# Altium PCB FlameClock_1.1.PcbDoc (part 1 of 2)
Units mm, origin at the board's own origin, x right, y up, seen from the top; angles counter-clockwise.
Board outline 139.1 x 139.1 mm, 2 copper layers (Top, Bottom); 164 components, 272 nets, 674 pads, 352 vias.
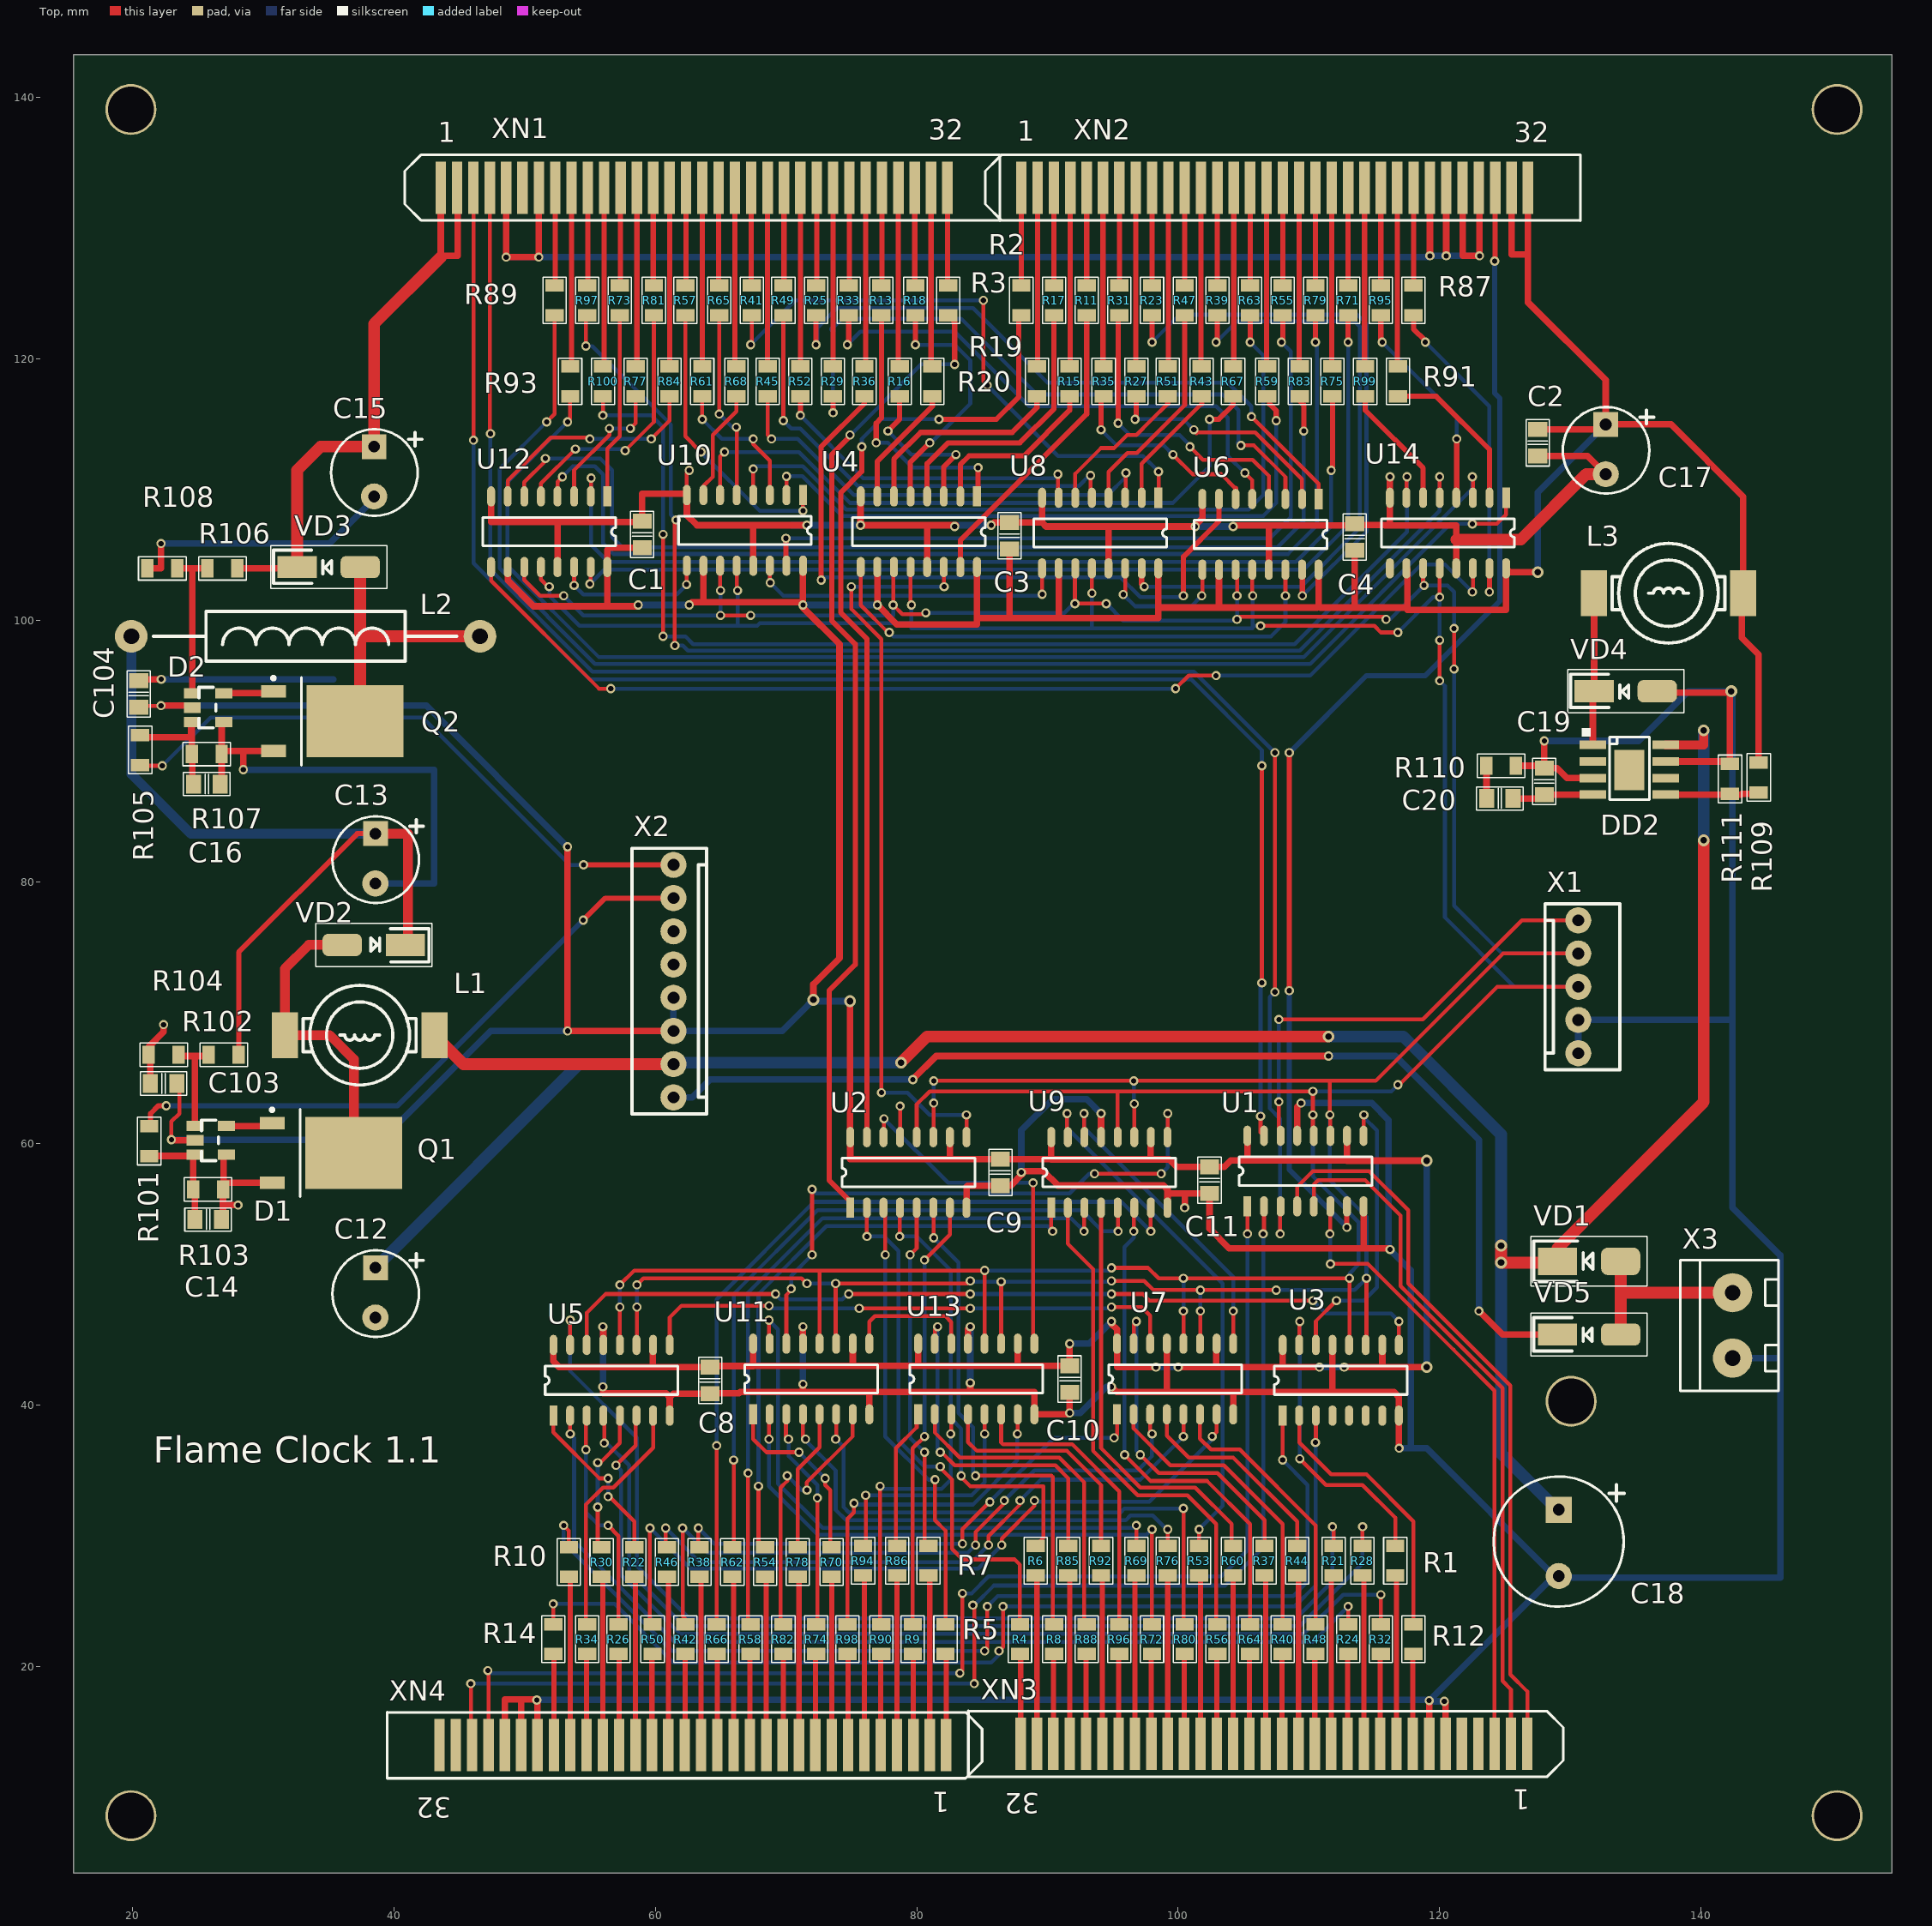
[diagram p0: Top view]
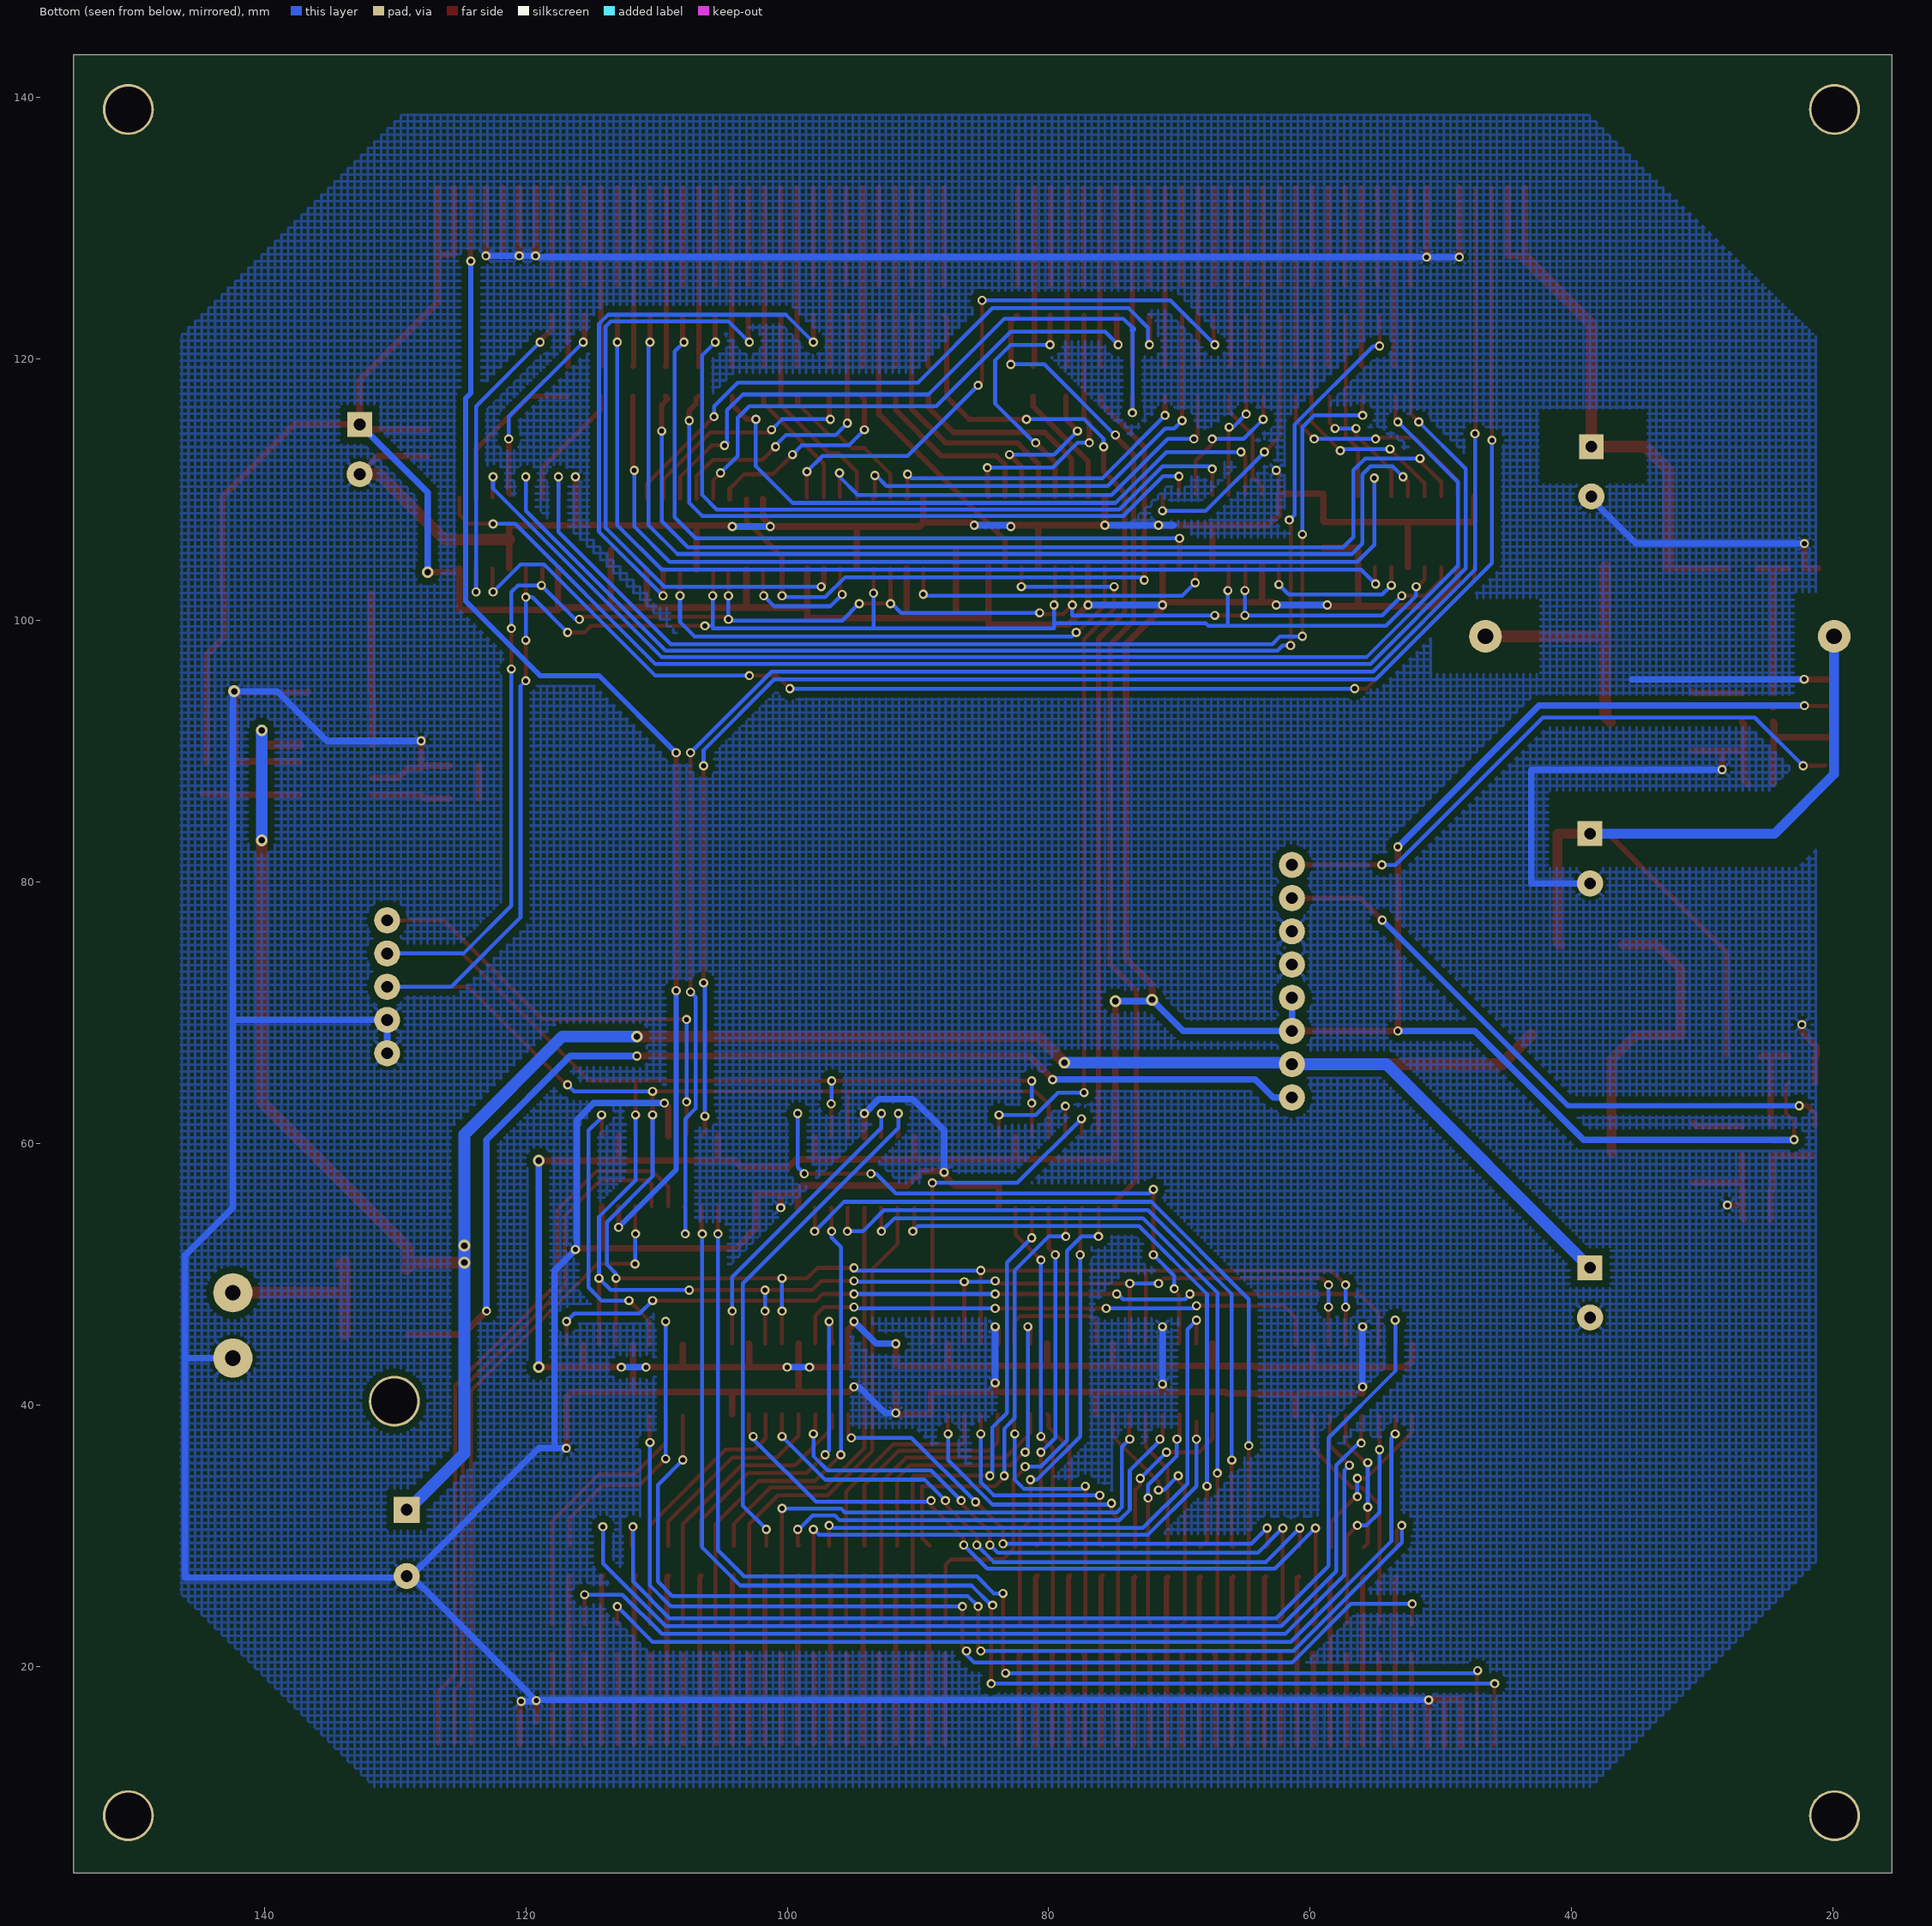
[diagram p1: Bottom view, seen from below]

## Layer stack, top to bottom
Top Solder: solder mask 0.0102, Solder Resist, Dk 3.5
Top: signal copper 0.0356
Dielectric 1: dielectric 0.32, FR-4, Dk 4.8
Bottom: signal copper 0.0356
Bottom Solder: solder mask 0.0102, Solder Resist, Dk 3.5

## Board outline
15.5,4.2 154.6,4.2 154.6,143.3 15.5,143.3

## Design rules (kind name [scope] priority, off if disabled: settings)
Clearance [All] p1: gap=0.2 ignorepadtopadclearanceinfootprint=TRUE except(0.5: Arc-Fill Arc-Poly Arc-Region Track-Fill Track-Poly Track-Region SMDPad-Fill SMDPad-Poly SMDPad-Region THPad-Fill THPad-Poly THPad-Region Via-Fill Via-Poly Via-Region Fill-Fill Fill-Poly Fill-Region Poly-Poly Poly-Region Region-Region)
Clearance Clearance_poligon [InPolygon] p2: gap=0.5 ignorepadtopadclearanceinfootprint=TRUE
PolygonConnect [All] p1: connectstyle=Relief reliefconductorwidth=0.254 reliefentries=4 polygonreliefangle="45 Angle" airgapwidth=0.254
RoutingVias [All] p1: holewidth=0.4 width=0.7 viastyle="Through Hole" minholewidth=0.4 minwidth=0.7 maxholewidth=0.9 maxwidth=1.5
SolderMaskExpansion [All] p1: expansion=0.102
Width [All] p1: maxlimit=0.9 minlimit=0.3 preferedwidth=0.5 minimp=50.000000 maximp=50.000000 favimp=50.000000
30 further rules are at their usual default settings.

## Components (designator, comment, footprint, x,y, rotation, side; value= is the part's Value field where it differs from the comment)
C1 "C0805_S" CC0805_S 59,106.6 r90 top value=220n
C2 "C0805_S" CC0805_S 127.5,113.6 r270 top value=220n
C3 "C0805_S" CC0805_S 87.1,106.5 r90 top value=220n
C4 "C0805_S" CC0805_S 113.5,106.4 r90 top value=220n
C8 "C0805_S" CC0805_S 64.2,41.9 r270 top value=220n
C9 "C0805_S" CC0805_S 86.4,57.8 r270 top value=220n
C10 "C0805_S" CC0805_S 91.7,42 r270 top value=220n
C11 "C0805_S" CC0805_S 102.4,57.2 r270 top value=220n
C12 "47uf 25v" CE3.8 38.6,46.7 r90 top
C13 "47uf 100v" CE3.8 38.6,79.9 r90 top
C14 "C0805_S" CC0805_S 25.8,54.2 r0 top value=220n
C15 "2.2uf 400v" CE3.8 38.5,109.5 r90 top
C16 "C0805_S" CC0805_S 25.7,87.5 r0 top value=220n
C17 "100uf 25v" CE3.8 132.7,111.2 r90 top
C18 "470uf 25v" CE10 129.1,26.924 r90 top
C19 "C0805_S" CC0805_S 128,87.7 r90 top value=220p
C20 "C0805_S" CC0805_S 124.6,86.4 r180 top value=22n
C103 "C0805_S" CC0805_S 22.4,64.6 r180 top value=220n
C104 "C0805_S" CC0805_S 20.5,94.4 r90 top value=220n
D1 "TC110" SOT-23A 26,60.2 r90 top
D2 "TC110" SOT-23A 25.8,93.3 r90 top
DD2 "L5973" "SO8 - termal" 131.712,90.5 r0 top
L1 "SMD_L" SMD_L 37.4,68.3 r180 top value=100mH
L2 "DROS" DROS 19.93,98.8 r0 top value=100mH
L3 "SMD_L" SMD_L 137.5,102.1 r0 top value=100mH
Q1 "IRFR220" TO-252AA_N 35.2,59.28 r0 top
Q2 "IRFR220" TO-252AA_N 35.3,92.3 r0 top
R1 "R0805_S" R0805_S 116.6,28.1 r90 top value=4k7
R2 "R0805_S" R0805_S 88,124.5 r270 top value=4k7
R3 "R0805_S" R0805_S 82.4,124.5 r270 top value=4k7
R4 "R0805_S" R0805_S 87.9,22.1 r90 top value=4k7
R5 "R0805_S" R0805_S 82.2,22.1 r90 top value=4k7
R6 "R0805_S" R0805_S 89.1,28.1 r90 top value=4k7
R7 "R0805_S" R0805_S 80.9,28.1 r90 top value=4k7
R8 "R0805_S" R0805_S 90.5,22.1 r90 top value=4k7
R9 "R0805_S" R0805_S 79.7,22.1 r90 top value=4k7
R10 "R0805_S" R0805_S 53.4,28 r90 top value=4k7
R11 "R0805_S" R0805_S 93,124.5 r270 top value=4k7
R12 "R0805_S" R0805_S 118,22.1 r90 top value=4k7
R13 "R0805_S" R0805_S 77.3,124.5 r270 top value=4k7
R14 "R0805_S" R0805_S 52.2,22.1 r90 top value=4k7
R15 "R0805_S" R0805_S 91.7,118.3 r270 top value=4k7
R16 "R0805_S" R0805_S 78.7,118.3 r270 top value=4k7
R17 "R0805_S" R0805_S 90.5,124.5 r270 top value=4k7
R18 "R0805_S" R0805_S 79.9,124.5 r270 top value=4k7
R19 "R0805_S" R0805_S 89.2,118.3 r270 top value=4k7
R20 "R0805_S" R0805_S 81.2,118.3 r270 top value=4k7
R21 "R0805_S" R0805_S 111.9,28.1 r90 top value=4k7
R22 "R0805_S" R0805_S 58.4,28 r90 top value=4k7
R23 "R0805_S" R0805_S 98,124.5 r270 top value=4k7
R24 "R0805_S" R0805_S 113,22.1 r90 top value=4k7
R25 "R0805_S" R0805_S 72.3,124.5 r270 top value=4k7
R26 "R0805_S" R0805_S 57.2,22.1 r90 top value=4k7
R27 "R0805_S" R0805_S 96.8,118.3 r270 top value=4k7
R28 "R0805_S" R0805_S 114.1,28.1 r90 top value=4k7
R29 "R0805_S" R0805_S 73.6,118.3 r270 top value=4k7
R30 "R0805_S" R0805_S 55.9,28 r90 top value=4k7
R31 "R0805_S" R0805_S 95.5,124.5 r270 top value=4k7
R32 "R0805_S" R0805_S 115.5,22.1 r90 top value=4k7
R33 "R0805_S" R0805_S 74.8,124.5 r270 top value=4k7
R34 "R0805_S" R0805_S 54.8,22.1 r90 top value=4k7
R35 "R0805_S" R0805_S 94.3,118.3 r270 top value=4k7
R36 "R0805_S" R0805_S 76,118.3 r270 top value=4k7
R37 "R0805_S" R0805_S 106.6,28.1 r90 top value=4k7
R38 "R0805_S" R0805_S 63.4,28 r90 top value=4k7
R39 "R0805_S" R0805_S 103,124.5 r270 top value=4k7
R40 "R0805_S" R0805_S 108,22.1 r90 top value=4k7
R41 "R0805_S" R0805_S 67.4,124.5 r270 top value=4k7
R42 "R0805_S" R0805_S 62.3,22.1 r90 top value=4k7
R43 "R0805_S" R0805_S 101.8,118.3 r270 top value=4k7
R44 "R0805_S" R0805_S 109.1,28.1 r90 top value=4k7
R45 "R0805_S" R0805_S 68.6,118.3 r270 top value=4k7
R46 "R0805_S" R0805_S 60.9,28 r90 top value=4k7
R47 "R0805_S" R0805_S 100.5,124.5 r270 top value=4k7
R48 "R0805_S" R0805_S 110.5,22.1 r90 top value=4k7
R49 "R0805_S" R0805_S 69.8,124.5 r270 top value=4k7
R50 "R0805_S" R0805_S 59.8,22.1 r90 top value=4k7
R51 "R0805_S" R0805_S 99.2,118.3 r270 top value=4k7
R52 "R0805_S" R0805_S 71.1,118.3 r270 top value=4k7
R53 "R0805_S" R0805_S 101.6,28.1 r90 top value=4k7
R54 "R0805_S" R0805_S 68.4,28 r90 top value=4k7
R55 "R0805_S" R0805_S 108,124.5 r270 top value=4k7
R56 "R0805_S" R0805_S 103,22.1 r90 top value=4k7
R57 "R0805_S" R0805_S 62.3,124.5 r270 top value=4k7
R58 "R0805_S" R0805_S 67.3,22.1 r90 top value=4k7
R59 "R0805_S" R0805_S 106.8,118.3 r270 top value=4k7
R60 "R0805_S" R0805_S 104.2,28.1 r90 top value=4k7
R61 "R0805_S" R0805_S 63.6,118.3 r270 top value=4k7
R62 "R0805_S" R0805_S 65.9,28 r90 top value=4k7
R63 "R0805_S" R0805_S 105.5,124.5 r270 top value=4k7
R64 "R0805_S" R0805_S 105.5,22.1 r90 top value=4k7
R65 "R0805_S" R0805_S 64.9,124.5 r270 top value=4k7
R66 "R0805_S" R0805_S 64.7,22.1 r90 top value=4k7
R67 "R0805_S" R0805_S 104.2,118.3 r270 top value=4k7
R68 "R0805_S" R0805_S 66.2,118.3 r270 top value=4k7
R69 "R0805_S" R0805_S 96.8,28.1 r90 top value=4k7
R70 "R0805_S" R0805_S 73.5,28 r90 top value=4k7
R71 "R0805_S" R0805_S 113,124.5 r270 top value=4k7
R72 "R0805_S" R0805_S 98,22.1 r90 top value=4k7
R73 "R0805_S" R0805_S 57.3,124.5 r270 top value=4k7
R74 "R0805_S" R0805_S 72.3,22.1 r90 top value=4k7
R75 "R0805_S" R0805_S 111.8,118.3 r270 top value=4k7
R76 "R0805_S" R0805_S 99.2,28.1 r90 top value=4k7
R77 "R0805_S" R0805_S 58.5,118.3 r270 top value=4k7
R78 "R0805_S" R0805_S 70.9,28 r90 top value=4k7
R79 "R0805_S" R0805_S 110.5,124.5 r270 top value=4k7
R80 "R0805_S" R0805_S 100.5,22.1 r90 top value=4k7
R81 "R0805_S" R0805_S 59.9,124.5 r270 top value=4k7
R82 "R0805_S" R0805_S 69.8,22.1 r90 top value=4k7
R83 "R0805_S" R0805_S 109.3,118.3 r270 top value=4k7
R84 "R0805_S" R0805_S 61.1,118.3 r270 top value=4k7
R85 "R0805_S" R0805_S 91.6,28.1 r90 top value=4k7
R86 "R0805_S" R0805_S 78.5,28.1 r90 top value=4k7
R87 "R0805_S" R0805_S 118,124.5 r270 top value=4k7
R88 "R0805_S" R0805_S 93,22.1 r90 top value=4k7
R89 "R0805_S" R0805_S 52.3,124.5 r270 top value=4k7
R90 "R0805_S" R0805_S 77.3,22.1 r90 top value=4k7
R91 "R0805_S" R0805_S 116.8,118.3 r270 top value=4k7
R92 "R0805_S" R0805_S 94.1,28.1 r90 top value=4k7
R93 "R0805_S" R0805_S 53.5,118.3 r270 top value=4k7
R94 "R0805_S" R0805_S 75.9,28.1 r90 top value=4k7
R95 "R0805_S" R0805_S 115.5,124.5 r270 top value=4k7
R96 "R0805_S" R0805_S 95.5,22.1 r90 top value=4k7
R97 "R0805_S" R0805_S 54.8,124.5 r270 top value=4k7
R98 "R0805_S" R0805_S 74.7,22.1 r90 top value=4k7
R99 "R0805_S" R0805_S 114.3,118.3 r270 top value=4k7
R100 "R0805_S" R0805_S 56,118.3 r270 top value=4k7
R101 "33k" R0805_S 21.3,60.2 r90 top
R102 "100k" R0805_S 27,66.8 r180 top
R103 "470k" R0805_S 25.8,56.5 r0 top
R104 "10k" R0805_S 22.4,66.8 r180 top
R105 "33k" R0805_S 20.6,90.1 r270 top
R106 "470k" R0805_S 26.9,104 r180 top
R107 "470k" R0805_S 25.7,89.8 r0 top
R108 "47k" R0805_S 22.3,104 r180 top
R109 "15k" R0805_S 144.4,88 r270 top
R110 "4k7" R0805_S 124.7,88.9 r0 top
R111 "5k6" R0805_S 142.2,87.9 r90 top
U1 "SN74HC595" SOIC16 105.29,55.2 r90 top
U2 "SN74HC595" SOIC16 74.92,55.1 r90 top
U3 "SN74HC595" SOIC16 107.99,39.2 r90 top
U4 "SN74HC595" SOIC16 84.61,109.5 r270 top
U5 "SN74HC595" SOIC16 52.22,39.2 r90 top
U6 "SN74HC595" SOIC16 110.74,109.3 r270 top
U7 "SN74HC595" SOIC16 95.32,39.3 r90 top
U8 "SN74HC595" SOIC16 98.48,109.4 r270 top
U9 "SN74HC595" SOIC16 90.29,55.1 r90 top
U10 "SN74HC595" SOIC16 71.31,109.6 r270 top
U11 "SN74HC595" SOIC16 67.49,39.3 r90 top
U12 "SN74HC595" SOIC16 56.34,109.5 r270 top
U13 "SN74HC595" SOIC16 80.11,39.3 r90 top
U14 "SN74HC595" SOIC16 125.08,109.4 r270 top
VD1 "*" DIOD_SS2 131.3,51 r90 top
VD2 "DIODE_SS1" DIOD_SS1 38.6,75.2 r270 top value=US2M
VD3 "DIODE_SS1" DIOD_SS1 34.9,104.1 r90 top value=US2M
VD4 "DIODE_SS1" DIOD_SS1 134.1,94.6 r90 top value=SS16
VD5 "DIODE_SS1" DIOD_SS1 131.3,45.4 r90 top
X1 "KONN_5_2,5" KONN_5_2.5MM 130.6,77.08 r270 top
X2 "KONN_8_2.5MM" KONN_8_2.5MM 61.4,63.54 r90 top
X3 "CONN_5MM_2" CONN5_2 142.4,48.6 r0 top
XN1 "KON_SMD_32_1.25MM" KON_SMD_32_1.25MM 43.6,133.1 r90 top
XN2 "KON_SMD_32_1.25MM" KON_SMD_32_1.25MM 88,133.1 r90 top
XN3 "KON_SMD_32_1.25MM" KON_SMD_32_1.25MM 126.7,14.1 r270 top
XN4 "KON_SMD_32_1.25MM" KON_SMD_32_1.25MM 82.25,14 r270 top

## Footprints (in the part's own frame and the unit in brackets; to place one, negate y for a bottom-side part, rotate by r counter-clockwise, add the part's x,y. Pads: shape width x height; smd on the part's side, far side on the other; paste and mask are expansions set on the pad)
CC0805_S [mm]
  rect 1.15x1.45 smd: 1(-1.016,0) 2(1.016,0)
  silkscreen extent -1.78,-0.89 1.78,0.89
CE3.8 [mm]
  rect 1.9x1.9 hole 0.9: 1(3.81,0)
  round 2 hole 0.9: 2(0,0)
  silkscreen extent -1.48,-3.67 5.13,3.28
CE10 [mm]
  rect 2x2 hole 0.9: 1(5.08,0)
  round 2 hole 0.9: 2(0,0)
  silkscreen extent -2.33,-5.02 7.62,4.97
CONN5_2 [mm]
  round 3 hole 1.2: 1(0,0) 2(0,-5)
  silkscreen extent -4,-7.5 3.5,2.5
DIOD_SS1 [mm]
  rect 1.7x3 smd: 1(0,2.286)
  rrect50% 1.7x3 smd: 2(0,-2.54)
  silkscreen extent -1.65,-4.57 1.65,4.32
DIOD_SS2 [mm]
  rect 2.1x3 smd: 1(0,2.286)
  rrect50% 2.1x3 smd: 2(0,-2.54)
  silkscreen extent -1.91,-4.57 1.9,4.32
DROS [mm]
  round 2.5 hole 1.2: 1(0,0) 2(26.67,0)
  silkscreen extent 1.7,-1.91 24.9,1.91
KON_SMD_32_1.25MM [mm]
  rect 4x0.8 smd: 1(0,0) 2(0,-1.25) 3(0,-2.5) 4(0,-3.75) 5(0,-5) 6(0,-6.25) 7(0,-7.5) 8(0,-8.75) 9(0,-10) 10(0,-11.25) 11(0,-12.5) 12(0,-13.75) 13(0,-15) 14(0,-16.25) 15(0,-17.5) 16(0,-18.75) 17(0,-20) 18(0,-21.25) 19(0,-22.5) 20(0,-23.75) 21(0,-25) 22(0,-26.25) 23(0,-27.5) 24(0,-28.75) 25(0,-30) 26(0,-31.25) 27(0,-32.5) 28(0,-33.75) 29(0,-35) 30(0,-36.25) 31(0,-37.5) 32(0,-38.75)
  silkscreen extent -2.53,-42.75 2.54,2.75
KONN_5_2.5MM [mm]
  round 2 hole 0.9: 1(0,0) 2(2.54,0) 3(5.08,0) 4(7.62,0) 5(10.16,0)
  silkscreen extent -1.27,-2.54 11.43,3.18
KONN_8_2.5MM [mm]
  round 2 hole 0.9: 1(0,0) 2(2.54,0) 3(5.08,0) 4(7.62,0) 5(10.16,0) 6(12.7,0) 7(15.24,0) 8(17.78,0)
  silkscreen extent -1.27,-2.54 19.05,3.18
R0805_S [mm]
  rect 0.95x1.4 smd: 1(-1.143,0) 2(1.143,0)
  silkscreen extent -1.78,-0.89 1.78,0.89
SMD_L [mm]
  rect 2x3.5 smd: 0(-5.715,0) 1(5.715,0)
  silkscreen extent -4.32,-3.81 4.32,3.81
"SO8 - termal" [mil]
  rect 80x26 smd: 1(0,0) 2(0,-50) 3(0,-100) 4(0,-150) 5(220,-150) 6(220,-100) 7(220,-50) 8(220,0)
  rect 90.55x122.05 smd: 9(110,-76)
  silkscreen extent -32,-165 170,50
SOIC16 [mm]
  rect 1.55x0.6 smd: 1(0,0)
  oval 1.55x0.6 smd: 2(0,-1.27) 3(0,-2.54) 4(0,-3.81) 5(0,-5.08) 6(0,-6.35) 7(0,-7.62) 8(0,-8.89) 9(5.4,-8.89) 10(5.4,-7.62) 11(5.4,-6.35) 12(5.4,-5.08) 13(5.4,-3.81) 14(5.4,-2.54) 15(5.4,-1.27) 16(5.4,0)
  silkscreen extent 1.61,-9.53 3.79,0.64, body extent -0.44,-9.53 5.84,0.64, height 1.75
SOT-23A [mm]
  rect 0.8x1.3 smd: 1(1.15,1.2) 2(0.05,1.2) 3(-1.05,1.2) 4(-1.05,-1.2) 5(1.15,-1.2)
  silkscreen extent -1.5,-0.6 1.6,0.7
TO-252AA_N [mm] "D-PAK, 4-Leads, Body 6.1x6.5mm, Pitch 2.28mm, Lead Span 9.9mm, IPC Medium Density"
  rect 1.9x0.95 smd: 1(-4.5,2.28) 3(-4.5,-2.28)
  rect 7.4x5.5 smd: 4(1.75,0)
  silkscreen extent -4.62,-3.35 -2.35,3.43, body extent -2.25,-3.37 4.1,3.37, height 2.38

## Part data
C12 C13 C15 C17: library part CE3.8_6.5MM
C18: library part CE5.0_10MM
Q1 Q2: "HEXFET Power MOSFET", Code_JEDEC=TO-252-AA, ComponentLink1Description="Manufacturer Link", ComponentLink1URL=http://www.irf.com/, ComponentLink2Description=Datasheet, ComponentLink2URL=http://www.irf.com/product-info/datasheets/data/irfr220.pdf, DatasheetVersion=PD-9.525D, LatestRevisionDate=20-Nov-2009, LatestRevisionNote="IPC-7351 Footprint Added.", Note="Pin 2 is trimmed and is electrically connected to Drain.", PackageDescription="3-Pin HEXFET Package 2.28 mm Pitch, 9.9 mm Lead Span", PackageReference=TO-252AA, PackageVersion=Feb-2003, Published=8-Jun-2000, Publisher="Altium Limited"
R101 R102 R103 R104 R105 R106 R107 R108 R109 R110 R111: library part R0805_S
U1 U2 U3 U4 U5 U6 U7 U8 U9 U10 U11 U12 U13 U14: "8-Bit Shift Registers with 3-State Output Registers"
VD1: library part DIODE_SS2

## Free pads (board coordinates)
  round 2 on Drill Drawing: 3(104,86.5)
  round 3.9 hole 3.5: 4(19.9,8.6) 5(19.9,139.1) 6(150.4,139.1) 7(130.048,40.3) 7(150.4,8.6)

## Via types
v1: diameter 0.7, hole 0.4, Top to Bottom, 340 vias
v2: diameter 0.9, hole 0.5, Top to Bottom, 12 vias

## Nets (pads, with @x,y where several pads share a name; then routed paths per layer and width w, separated by ;. In a path a pad name is that pad's centre, name@x,y a point inside that pad or via, vN(x,y) a via of type N, cw(c..) or ccw(c..) an arc to the next point about the centre after c; other vN are vias at no path point)
12_PWR: VD5.1 X2.1 | length 85.4
  Top w0.5: v1(79.7,64.9) 81.5,66.7 v1(111.5,66.7) ; v1(123,47.2) 124.8,45.4 VD5.1@129.014,45.4
  Bottom w0.5: X2.1@61.4,63.54 62.84,63.54 64.2,64.9 v1(79.7,64.9) ; v1(111.5,66.7) 116.6,66.7 123,60.3 v1(123,47.2)
+3.3v: 
+12v: C12.1 C18.1 DD2.8 L1.0 VD1.1 X2.2 | length 202.3
  Top w0.7: VD1.1@129.014,52.014 129.114,52.114 ; DD2.8@137.3,90.5 140.2,90.5 v2(140.2,91.6)
  Top w0.9: L1.0@43.115,68.3 45.335,66.08 X2.2@61.4,66.08 ; v2(78.8,66.2) 80.8,68.2 v2(111.5,68.2) ; v2(124.7,52.2) v2(124.7,50.9) 128.6,50.9 VD1.1@129.014,50.486 ; VD1.1@129.014,52.014 VD1.1@129.014,51 VD1.1@129.014,50.486 ; VD1.1@129.114,50.386 VD1.1@129.014,50.486 ; 129.114,52.114 140.2,63.2 v2(140.2,83.2)
  Bottom w0.9: C12.1@38.6,50.51 54.17,66.08 X2.2@61.4,66.08 61.62,66.3 61.72,66.2 v2(78.8,66.2) ; v2(111.5,68.2) 117.2,68.2 124.7,60.7 v2(124.7,52.2) v2(124.7,50.9) 124.7,36.3 C18.1@129.2,31.8 ; v2(140.2,83.2) v2(140.2,91.6)
+50V: C13.1 L2.1 R102.1 VD2.1 | length 64.2
  Top w0.4: R102.1@28.143,66.8 28.143,74.643 37.21,83.71 C13.1@38.6,83.71
  Top w0.75: C13.1@38.6,83.71 41.09,83.71 41.09,75.404 VD2.1@40.886,75.2
  Bottom w0.75: L2.1@19.93,98.8 19.93,88.27 24.49,83.71 C13.1@38.6,83.71
+250v: C15.1 R106.1 VD3.1 XN1.1 XN1.2 | length 47.1
  Top w0.5: R106.1@28.043,104 32.514,104 VD3.1@32.614,104.1 ; XN1.1@43.6,133.1 43.6,127.8 43.7,127.9 44.9,127.9 44.9,133.05 XN1.2@44.85,133.1
  Top w0.9: VD3.1@32.614,104.1 32.614,111.514 34.41,113.31 C15.1@38.5,113.31 38.5,122.7 43.6,127.8
A001: R87.1 XN2.25 | length 7.5
  Top w0.4: R87.1@118,125.643 XN2.25@118,133.1
A002: R89.1 XN1.8 | length 7.5
  Top w0.4: R89.1@52.3,125.643 52.35,125.693 XN1.8@52.35,133.1
A003: R91.1 XN2.24 | length 13.7
  Top w0.4: XN2.24@116.75,133.1 116.75,119.493 R91.1@116.8,119.443
A004: R93.1 XN1.9 | length 13.7
  Top w0.4: R93.1@53.5,119.443 53.6,119.543 XN1.9@53.6,133.1
A005: R95.1 XN2.23 | length 7.5
  Top w0.4: R95.1@115.5,125.643 XN2.23@115.5,133.1
A006: R97.1 XN1.10 | length 7.5
  Top w0.4: R97.1@54.8,125.643 54.85,125.693 XN1.10@54.85,133.1
A007: R99.1 XN2.22 | length 13.7
  Top w0.4: XN2.22@114.25,133.1 114.25,119.493 R99.1@114.3,119.443
A008: R100.1 XN1.11 | length 13.7
  Top w0.4: R100.1@56,119.443 56.1,119.543 XN1.11@56.1,133.1
A009: R71.1 XN2.21 | length 7.5
  Top w0.4: R71.1@113,125.643 XN2.21@113,133.1
A010: R73.1 XN1.12 | length 7.5
  Top w0.4: R73.1@57.3,125.643 57.35,125.693 XN1.12@57.35,133.1
A011: R75.1 XN2.20 | length 13.7
  Top w0.4: XN2.20@111.75,133.1 111.75,119.493 R75.1@111.8,119.443
A012: R77.1 XN1.13 | length 13.7
  Top w0.4: R77.1@58.5,119.443 58.6,119.543 XN1.13@58.6,133.1
A013: R79.1 XN2.19 | length 7.5
  Top w0.4: R79.1@110.5,125.643 XN2.19@110.5,133.1
A014: R81.1 XN1.14 | length 7.5
  Top w0.4: XN1.14@59.85,133.1 59.85,125.693 R81.1@59.9,125.643
A015: R83.1 XN2.18 | length 13.7
  Top w0.4: XN2.18@109.25,133.1 109.25,119.493 R83.1@109.3,119.443
A016: R84.1 XN1.15 | length 13.7
  Top w0.4: R84.1@61.1,119.443 XN1.15@61.1,133.1
A017: R55.1 XN2.17 | length 7.5
  Top w0.4: R55.1@108,125.643 XN2.17@108,133.1
A018: R57.1 XN1.16 | length 7.5
  Top w0.4: R57.1@62.3,125.643 62.35,125.693 XN1.16@62.35,133.1
A019: R59.1 XN2.16 | length 13.7
  Top w0.4: XN2.16@106.75,133.1 106.75,119.493 R59.1@106.8,119.443
A020: R61.1 XN1.17 | length 13.7
  Top w0.4: R61.1@63.6,119.443 XN1.17@63.6,133.1
A021: R63.1 XN2.15 | length 7.5
  Top w0.4: R63.1@105.5,125.643 XN2.15@105.5,133.1
A022: R65.1 XN1.18 | length 7.5
  Top w0.4: XN1.18@64.85,133.1 64.85,125.693 R65.1@64.9,125.643
A023: R67.1 XN2.14 | length 13.7
  Top w0.4: R67.1@104.2,119.443 104.25,119.493 XN2.14@104.25,133.1
A024: R68.1 XN1.19 | length 13.7
  Top w0.4: XN1.19@66.1,133.1 66.1,119.543 R68.1@66.2,119.443
A025: R39.1 XN2.13 | length 7.5
  Top w0.4: R39.1@103,125.643 XN2.13@103,133.1
A026: R41.1 XN1.20 | length 7.5
  Top w0.4: XN1.20@67.35,133.1 67.35,125.693 R41.1@67.4,125.643
A027: R43.1 XN2.12 | length 13.7
  Top w0.4: XN2.12@101.75,133.1 101.75,119.493 R43.1@101.8,119.443
A028: R45.1 XN1.21 | length 13.7
  Top w0.4: R45.1@68.6,119.443 XN1.21@68.6,133.1
A029: R47.1 XN2.11 | length 7.5
  Top w0.4: R47.1@100.5,125.643 XN2.11@100.5,133.1
A030: R49.1 XN1.22 | length 7.5
  Top w0.4: R49.1@69.8,125.643 69.85,125.693 XN1.22@69.85,133.1
A031: R51.1 XN2.10 | length 13.7
  Top w0.4: R51.1@99.2,119.443 99.25,119.493 XN2.10@99.25,133.1
A032: R52.1 XN1.23 | length 13.7
  Top w0.4: R52.1@71.1,119.443 XN1.23@71.1,133.1
A033: R23.1 XN2.9 | length 7.5
  Top w0.4: R23.1@98,125.643 XN2.9@98,133.1
A034: R25.1 XN1.24 | length 7.5
  Top w0.4: R25.1@72.3,125.643 72.35,125.693 XN1.24@72.35,133.1
A035: R27.1 XN2.8 | length 13.7
  Top w0.4: XN2.8@96.75,133.1 96.75,119.493 R27.1@96.8,119.443
A036: R29.1 XN1.25 | length 13.7
  Top w0.4: R29.1@73.6,119.443 XN1.25@73.6,133.1
A037: R31.1 XN2.7 | length 7.5
  Top w0.4: R31.1@95.5,125.643 XN2.7@95.5,133.1
A038: R33.1 XN1.26 | length 7.5
  Top w0.4: R33.1@74.8,125.643 74.85,125.693 XN1.26@74.85,133.1
A039: R35.1 XN2.6 | length 13.7
  Top w0.4: XN2.6@94.25,133.1 94.25,119.493 R35.1@94.3,119.443
A040: R36.1 XN1.27 | length 13.7
  Top w0.4: R36.1@76,119.443 76.1,119.543 XN1.27@76.1,133.1
A041: R11.1 XN2.5 | length 7.5
  Top w0.4: R11.1@93,125.643 XN2.5@93,133.1
A042: R13.1 XN1.28 | length 7.5
  Top w0.4: R13.1@77.3,125.643 77.35,125.693 XN1.28@77.35,133.1
A043: R15.1 XN2.4 | length 13.7
  Top w0.4: XN2.4@91.75,133.1 91.75,119.493 R15.1@91.8,119.443
A044: R16.1 XN1.29 | length 13.7
  Top w0.4: XN1.29@78.6,133.1 78.6,119.543 R16.1@78.7,119.443
A045: R17.1 XN2.3 | length 7.5
  Top w0.4: R17.1@90.5,125.643 XN2.3@90.5,133.1
A046: R18.1 XN1.30 | length 7.5
  Top w0.4: XN1.30@79.85,133.1 79.85,125.693 R18.1@79.9,125.643
A047: R19.1 XN2.2 | length 13.7
  Top w0.4: R19.1@89.2,119.443 89.25,119.493 XN2.2@89.25,133.1
A048: R20.1 XN1.31 | length 13.7
  Top w0.4: XN1.31@81.1,133.1 81.1,119.543 R20.1@81.2,119.443
A049: R2.1 XN2.1 | length 7.5
  Top w0.4: R2.1@88,125.643 XN2.1@88,133.1
A050: R3.1 XN1.32 | length 7.5
  Top w0.4: XN1.32@82.35,133.1 82.35,125.693 R3.1@82.4,125.643
A051: R4.1 XN3.32 | length 6.9
  Top w0.4: XN3.32@87.95,14.1 87.95,20.907 R4.1@88,20.957
A052: R5.1 XN4.1 | length 7
  Top w0.4: R5.1@82.2,20.957 82.25,20.907 XN4.1@82.25,14
A053: R6.1 XN3.31 | length 12.9
  Top w0.4: R6.1@89.1,26.957 89.2,26.857 XN3.31@89.2,14.1
A054: R7.1 XN4.2 | length 13
  Top w0.4: R7.1@80.9,26.957 81,26.857 XN4.2@81,14
A055: R8.1 XN3.30 | length 6.9
  Top w0.4: XN3.30@90.45,14.1 90.45,20.907 R8.1@90.5,20.957
A056: R9.1 XN4.3 | length 7
  Top w0.4: R9.1@79.7,20.957 79.75,20.907 XN4.3@79.75,14
A057: R85.1 XN3.29 | length 12.9
  Top w0.4: R85.1@91.6,26.957 91.7,26.857 XN3.29@91.7,14.1
A058: R86.1 XN4.4 | length 13
  Top w0.4: R86.1@78.4,26.957 78.5,26.857 XN4.4@78.5,14
A059: R88.1 XN3.28 | length 6.9
  Top w0.4: XN3.28@92.95,14.1 92.95,20.907 R88.1@93,20.957
A060: R90.1 XN4.5 | length 7
  Top w0.4: XN4.5@77.25,14 77.25,20.907 R90.1@77.3,20.957
A061: R92.1 XN3.27 | length 12.9
  Top w0.4: R92.1@94.1,26.957 94.2,26.857 XN3.27@94.2,14.1
A062: R94.1 XN4.6 | length 13
  Top w0.4: R94.1@75.9,26.957 76,26.857 XN4.6@76,14
A063: R96.1 XN3.26 | length 6.9
  Top w0.4: XN3.26@95.45,14.1 95.45,20.907 R96.1@95.5,20.957
A064: R98.1 XN4.7 | length 7
  Top w0.4: R98.1@74.7,20.957 74.75,20.907 XN4.7@74.75,14
A065: R69.1 XN3.25 | length 12.9
  Top w0.4: R69.1@96.6,26.957 96.7,26.857 XN3.25@96.7,14.1
A066: R70.1 XN4.8 | length 12.9
  Top w0.4: R70.1@73.4,26.857 73.5,26.757 XN4.8@73.5,14
A067: R72.1 XN3.24 | length 6.9
  Top w0.4: XN3.24@97.95,14.1 97.95,20.907 R72.1@98,20.957
A068: R74.1 XN4.9 | length 7
  Top w0.4: XN4.9@72.25,14 72.25,20.907 R74.1@72.3,20.957
A069: R76.1 XN3.23 | length 12.9
  Top w0.4: R76.1@99.1,26.957 99.2,26.857 XN3.23@99.2,14.1
A070: R78.1 XN4.10 | length 12.9
  Top w0.4: R78.1@70.9,26.857 71,26.757 XN4.10@71,14
A071: R80.1 XN3.22 | length 6.9
  Top w0.4: XN3.22@100.45,14.1 100.45,20.907 R80.1@100.5,20.957
A072: R82.1 XN4.11 | length 7
  Top w0.4: XN4.11@69.75,14 69.8,14.05 R82.1@69.8,20.957
A073: R53.1 XN3.21 | length 12.9
  Top w0.4: R53.1@101.6,26.957 101.7,26.857 XN3.21@101.7,14.1
A074: R54.1 XN4.12 | length 12.9
  Top w0.4: R54.1@68.4,26.857 68.5,26.757 XN4.12@68.5,14
A075: R56.1 XN3.20 | length 6.9
  Top w0.4: XN3.20@102.95,14.1 102.95,20.907 R56.1@103,20.957
A076: R58.1 XN4.13 | length 7
  Top w0.4: XN4.13@67.25,14 67.25,20.907 R58.1@67.3,20.957
A077: R60.1 XN3.19 | length 12.9
  Top w0.4: R60.1@104.1,26.957 104.2,26.857 XN3.19@104.2,14.1
A078: R62.1 XN4.14 | length 12.9
  Top w0.4: R62.1@65.9,26.857 66,26.757 XN4.14@66,14
A079: R64.1 XN3.18 | length 6.9
  Top w0.4: XN3.18@105.45,14.1 105.45,20.907 R64.1@105.5,20.957
A080: R66.1 XN4.15 | length 7
  Top w0.4: R66.1@64.7,20.957 64.75,20.907 XN4.15@64.75,14
A081: R37.1 XN3.17 | length 12.9
  Top w0.4: R37.1@106.6,26.957 106.7,26.857 XN3.17@106.7,14.1
A082: R38.1 XN4.16 | length 12.9
  Top w0.4: R38.1@63.4,26.857 63.5,26.757 XN4.16@63.5,14
A083: R40.1 XN3.16 | length 6.9
  Top w0.4: XN3.16@107.95,14.1 107.95,20.907 R40.1@108,20.957
A084: R42.1 XN4.17 | length 7
  Top w0.254: XN4.17@62.25,14 XN4.17@62.3,14.05
  Top w0.4: XN4.17@62.3,14.05 R42.1@62.3,20.957
A085: R44.1 XN3.15 | length 12.9
  Top w0.4: R44.1@109.1,26.957 109.2,26.857 XN3.15@109.2,14.1
A086: R46.1 XN4.18 | length 12.9
  Top w0.4: R46.1@60.9,26.857 61,26.757 XN4.18@61,14
A087: R48.1 XN3.14 | length 6.9
  Top w0.4: XN3.14@110.45,14.1 110.45,20.907 R48.1@110.5,20.957
A088: R50.1 XN4.19 | length 7
  Top w0.4: XN4.19@59.75,14 R50.1@59.75,20.907
  Top w0.5: R50.1@59.75,20.907 R50.1@59.8,20.957
A089: R21.1 XN3.13 | length 12.9
  Top w0.4: R21.1@111.6,26.957 111.7,26.857 XN3.13@111.7,14.1
A090: R22.1 XN4.20 | length 12.8
  Top w0.4: XN4.20@58.5,14 R22.1@58.5,26.757
A091: R24.1 XN3.12 | length 6.9
  Top w0.4: XN3.12@112.95,14.1 112.95,20.907 R24.1@113,20.957
A092: R26.1 XN4.21 | length 7
  Top w0.4: R26.1@57.2,20.957 57.25,20.907 XN4.21@57.25,14
A093: R28.1 XN3.11 | length 12.9
  Top w0.4: R28.1@114.1,26.957 114.2,26.857 XN3.11@114.2,14.1
A094: R30.1 XN4.22 | length 12.9
  Top w0.4: R30.1@55.9,26.857 56,26.757 XN4.22@56,14
A095: R32.1 XN3.10 | length 6.9
  Top w0.4: XN3.10@115.45,14.1 115.45,20.907 R32.1@115.5,20.957
A096: R34.1 XN4.23 | length 7
  Top w0.4: XN4.23@54.75,14 54.75,20.907 R34.1@54.8,20.957
A097: R1.1 XN3.9 | length 12.9
  Top w0.4: R1.1@116.6,26.957 116.7,26.857 XN3.9@116.7,14.1
A098: R10.1 XN4.24 | length 12.9
  Top w0.4: R10.1@53.4,26.857 53.5,26.757 XN4.24@53.5,14
A099: R12.1 XN3.8 | length 6.9
  Top w0.4: XN3.8@117.95,14.1 117.95,20.907 R12.1@118,20.957
A100: R14.1 XN4.25 | length 7
  Top w0.4: XN4.25@52.25,14 52.25,20.907 R14.1@52.3,20.957
BUZZER: 
D+: 
D-: 
"Display Data": U1.14 X1.1 | length 35
  Top w0.3: v1(107.7,63.2) 107.7,60.73 U1.14@107.83,60.6 ; v1(107.7,69.5) 118.7,69.5 126.28,77.08 X1.1@130.6,77.08
  Bottom w0.3: v1(107.7,63.2) v1(107.7,69.5)
GND: C1.2 C2.2 C3.2 C4.2 C8.2 C9.2 C10.2 C11.2 C12.2 C13.2 C14.2 C15.2 C16.2 C17.2 C18.2 C19.2 C103.2 C104.2 D1.4 D2.4 DD2.3 DD2.7 Q1.3 Q2.3 R103.2 R104.2 R107.2 R108.2 R110.2 R111.2 U1.8 U1.13 U2.8 U2.13 U3.8 U3.13 U4.8 U4.13 U5.8 U5.13 U6.8 U6.13 U7.8 U7.13 U8.8 U8.13 U9.8 U9.13 U10.8 U10.13 U11.8 U11.13 U12.8 U12.13 U13.8 U13.13 U14.8 U14.13 VD4.2 X1.4 X1.5 X2.5 X2.6 X3.2 XN1.5 XN1.7 XN2.26 XN2.27 XN2.28 XN2.29 XN3.6 XN3.7 XN4.26 XN4.27 XN4.28 | length 788.4
  Top w0.3: U10.8@62.42,109.6 62.42,111.32 v1(62.6,111.5) ; U2.13@78.73,60.5 v1(78.73,62.87)
  Top w0.5: C104.2@20.5,95.516 v1(22.216,95.516) v1@22.284,95.516 ; R108.2@21.157,104 22.2,104 v1(22.2,105.9) ; R104.2@21.257,66.8 21.384,66.673 C103.2@21.384,64.7 ; R104.2@21.3,67.1 21.3,67.443 22.4,68.543 v1(22.4,69.1) ; C16.2@26.516,87.5 26.843,87.827 R107.2@26.843,89.8 ; C14.2@26.816,54.2 26.943,54.327 26.943,55.3 ; D1.4@27,59.15 R103.2@27,56.9 ; D2.4@27,92.25 26.843,92.093 R107.2@26.843,89.8 ; v1(28.1,55.3) 26.943,55.3 ; v1(28.5,88.6) 28.5,90.02 ; Q1.3@30.7,57 27.1,57 R103.2@27,56.9 ; Q2.3@30.8,90.02 28.5,90.02 ; U12.8@47.45,109.5 47.45,107.55 52.5,107.55 ; XN4.28@48.5,14 48.5,17.5 49.8,17.5 ; XN1.5@48.6,133.1 v1(48.6,127.8) v1(51.1,127.8) XN1.7@51.1,133.1 ; XN4.27@49.75,14 49.75,17.45 49.8,17.5 ; XN4.26@51,14 51,17.5 49.8,17.5 ; U12.13@52.53,104.1 52.53,107.52 52.5,107.55 ; v1(56,41.4) 56,40.93 56.03,40.9 60.82,40.9 61.11,40.61 ; v1(56,46) 56.03,45.97 U5.13@56.03,44.6 ; U5.8@61.11,39.2 61.11,40.61 ; U10.13@67.5,104.2 67.5,107.2 67.4,107.3 ; v1(71.3,41.6) 71.3,41 ; U11.13@71.3,44.7 v1(71.3,46) ; v1(71.6,107.3) 67.4,107.3 ; U4.8@75.72,109.5 75.7,109.48 v1(75.7,107.3) 80.9,107.3 ; U11.8@76.38,39.3 76.38,41 ; U4.13@80.8,104.1 80.8,107.2 80.9,107.3 ; v1(82.9,107.2) 83,107.3 80.9,107.3 ; U2.8@83.81,55.1 83.81,56.71 83.884,56.784 C9.2@86.4,56.784 87.184,56.784 v1@88.05,57.65 ; U13.13@83.92,44.7 83.92,45.82 v1(84.1,46) ; v1(84.1,41.7) 84.1,41.1 84,41 ; v1(85.7,107.3) 85.916,107.516 C3.2@87.1,107.516 89.584,107.516 ; v1@88.3,57.9 89.7,57.9 90.8,56.8 98.86,56.8 99.18,56.48 99.18,56.18 ; U8.8@89.59,109.4 89.584,109.394 89.584,107.516 ; C10.2@91.7,40.984 v1(91.7,39.4) 91.6,39.3 U13.8@89,39.3 89,41 84,41 ; U9.13@94.1,60.5 v1(94.1,62.3) ; U8.13@94.67,104 94.67,107.2 ; v1(94.9,41.4) 95.3,41 99.13,41 ; U7.13@99.13,44.7 99.13,41 ; U9.8@99.18,55.1 99.18,56.18 ; v1(100.5,55.1) 100.5,56.18 ; v1(101.3,107.2) 101.3,107.316 101.184,107.2 94.67,107.2 ; 101.516,107.516 101.85,107.85 U6.8@101.85,109.3 ; v1(104.2,107.2) 104.27,107.27 106.93,107.27 ; U7.8@104.21,39.3 104.21,41 ; U6.13@106.93,103.9 106.93,107.27 ; U1.13@109.1,60.6 109.1,62.8 v1(109.4,63.1) ; U3.13@111.8,44.6 111.8,41 ; U1.8@114.18,55.2 114.18,52 ; v1(116.2,51.9) 116.2,52 114.18,52 ; v1(116.2,111) 116.19,110.99 U14.8@116.19,109.4 116.19,107.31 115.8,107.31 ; v1(116.9,36.7) 116.88,36.72 U3.8@116.88,39.2 116.88,40.62 116.5,41 111.8,41 ; XN3.7@119.2,15.8 v1(119.2,17.4) ; v1(119.25,127.9) XN2.26@119.25,133.1 ; XN3.6@120.45,14.1 v1@120.45,17.35 ; v1(120.5,127.9) XN2.27@120.5,133.1 ; U14.13@121.27,104 121.27,106.2 121.27,107.27 115.84,107.27 115.8,107.31 ; XN2.28@121.75,133.1 121.75,127.925 121.775,127.9 v1(123.05,127.9) 123.05,133.05 XN2.29@123,133.1 ; R110.2@125.843,88.9 127.816,88.9 C19.2@128,88.716 ; C2.2@127.5,112.584 131.316,112.584 C17.2@132.7,111.2 ; v1(128,90.8) C19.2@128,88.716 ; DD2.3@131.712,87.96 129.74,87.96 128.984,88.716 C19.2@128,88.716 ; VD4.2@136.64,94.6 136.74,94.5 142.2,94.5 R111.2@142.2,89.23 ; DD2.7@137.3,89.23 R111.2@142.2,89.23 ; R111.2@142.2,89.043 R111.2@142.2,89.23 ; R107.2@26.843,89.8 27.063,90.02 28.5,90.02 ; 26.943,55.3 R103.2@26.943,56.5 27,56.557 R103.2@27,56.9 ; 52.5,107.55 58.934,107.55 C1.2@59,107.616 59,109.7 62.32,109.7 U10.8@62.42,109.6 62.42,108.08 63.2,107.3 67.4,107.3 ; 61.11,40.61 61.384,40.884 C8.2@64.2,40.884 64.216,40.9 66.4,40.9 66.5,41 71.3,41 ; 71.3,41 76.38,41 ; 76.38,41 84,41 ; 89.584,107.516 89.9,107.2 94.67,107.2 ; 99.13,41 104.21,41 ; 99.18,56.18 100.5,56.18 ; 100.5,56.18 102.396,56.18 C11.2@102.4,56.184 102.4,53.5 103.9,52 114.18,52 ; 104.21,41 111.8,41 ; 106.93,107.27 113.354,107.27 113.394,107.31 115.8,107.31
  Top w0.9: 121.27,106.2 126.2,106.2 131.2,111.2 C17.2@132.7,111.2
  Bottom w0.5: v1(22.2,105.9) 35.1,105.9 38.5,109.3 C15.2@38.5,109.5 ; v1(22.216,95.516) 35.388,95.516 ; v1(28.5,88.6) 43.1,88.6 43.1,79.9 C13.2@38.6,79.9 ; v1(48.6,127.8) v1(51.1,127.8) 119.15,127.8 v1(119.25,127.9) v1(120.5,127.9) v1(123.05,127.9) ; v1(50.95,17.45) 119.15,17.45 v1(119.2,17.4) ; v1(56,41.4) v1(56,46) ; 70.454,107.3 v1(71.6,107.3) v1(75.7,107.3) ; v1(71.3,41.6) v1(71.3,46) ; v1(82.9,107.2) 83,107.3 v1(85.7,107.3) ; v1(84.1,41.7) v1(84.1,46) ; v1(88,57.8) 88,61 90.4,63.4 93,63.4 v1(94.1,62.3) ; v1(91.7,39.4) 92.5,39.4 94.5,41.4 v1(94.9,41.4) ; v1(101.3,107.2) v1(104.2,107.2) ; v1(109.4,63.1) 114.8,63.1 116.1,61.8 116.1,52 v1(116.2,51.9) 117.8,50.3 117.8,36.8 117.7,36.7 ; v1(116.9,36.7) 117.7,36.7 ; v1(120.35,17.35) 119.25,17.35 v1(119.2,17.4) ; v1(128,90.8) 135.2,90.8 139,94.6 v2(142.3,94.6) 142.4,94.5 142.4,69.46 ; X1.5@130.6,66.92 X1.4@130.6,69.46 142.4,69.46 ; X3.2@142.4,43.6 145.962,43.6 146.05,43.688 ; 146,51.5 142.4,55.1 142.4,69.46 ; 146.05,51.45 146.05,43.688 ; 117.7,36.7 119,36.7 C18.2@128.75,26.95 ; v1(119.2,17.4) C18.2@128.75,26.95 ; C18.2@128.75,26.95 129.1,27.3 C18.2@129.1,26.924 129.1,26.8 146.05,26.8 146.05,43.688
INCOM_PWR: 
KN1: 
KN2: 
KN3: 
KN4: 
Latch: U1.12 U2.12 U3.12 U4.12 U5.12 U6.12 U7.12 U8.12 U9.12 U10.12 U11.12 U12.12 U13.12 U14.12 X1.3 | length 291.3
  Top w0.3: U12.12@51.26,104.1 51.26,103.14 51.8,102.6 v1(51.9,102.6) ; U5.12@57.3,44.6 v1(57.3,47.5) ; v1(57.3,49.2) 58.4,50.3 72.5,50.3 ; U10.12@66.23,104.2 66.23,102.37 v1(66.3,102.3) ; U11.12@72.57,44.7 72.57,50.23 72.5,50.3 ; U4.12@79.53,104.1 79.53,101.27 v1(79.6,101.2) ; U2.12@80,60.5 80,63 81,64 95.37,64 ; U13.12@85.19,44.7 85.19,50.29 v1(85.2,50.3) 72.5,50.3 ; v1(93.4,102.1) U8.12@93.4,104 ; v1(94.9,50.5) 97.7,50.5 98.5,49.7 v1(100.4,49.7) v1(113.1,49.7) 113.1,44.63 U3.12@113.07,44.6 ; U9.12@95.37,60.5 95.37,64 ; U7.12@100.4,44.7 v1(100.4,47.2) ; U6.12@105.66,103.9 105.66,101.94 v1(105.7,101.9) ; v1(106.3,99.6) 115,99.6 115.5,99.1 v1(116.8,99.1) ; U1.12@110.37,60.6 110.3,60.67 v1(110.3,62.2) v1(110.3,64) 95.37,64 ; v1(116.8,64.5) 116.9,64.5 124.4,72 X1.3@130.6,72 ; v1(120,95.4) v1(120,98.5) ; v1(120,101.8) U14.12@120,104
  Bottom w0.3: v1(51.9,102.6) 51.9,101.9 54.2,99.6 66.3,99.6 ; v1(57.3,47.5) v1(57.3,49.2) ; v1(66.3,102.3) 66.3,99.6 ; v1(79.6,101.2) 79.6,99.8 ; v1(85.2,50.3) 94.7,50.3 v1(94.9,50.5) ; v1(93.4,102.1) 93.4,99.4 ; v1(100.4,47.2) v1(100.4,49.7) ; v1(105.7,101.9) 105.7,99.6 ; v1(106.3,99.6) 105.7,99.6 ; v1(110.3,62.2) 110.3,57.5 113.8,54 113.8,50.76 113.1,50.06 v1(113.1,49.7) ; v1(110.3,64) 116.3,64 v1(116.8,64.5) ; v1(116.8,99.1) 119.5,101.8 v1(120,101.8) v1(120,98.5) ; v1(120,95.4) 120.4,95 120.4,77.3 125.7,72 X1.3@130.6,72 ; 66.3,99.6 67.8,99.6 68,99.8 79.6,99.8 ; 79.6,99.8 79.6,99.4 93.4,99.4 ; 93.4,99.4 105.7,99.4 105.7,99.6
NetBP1_1: 
NetC5_1: 
NetC7_1: 
NetC14_1: C14.1 D1.3 R101.1 R103.1 | length 8.1
  Top w0.5: R101.1@21.6,59.057 24.507,59.057 24.6,59.15 24.657,59.093 R103.1@24.657,56.5 24.784,56.373 C14.1@24.784,54.2
NetC16_1: C16.1 D2.3 R105.1 R107.1 | length 9.9
  Top w0.5: R105.1@20.5,91.086 24.486,91.086 24.507,91.107 24.507,92.157 D2.3@24.557,92.207 ; C16.1@24.584,87.5 24.584,89.773 R107.1@24.557,89.8 D2.3@24.557,92.207 ; D2.3@24.6,92.25 D2.3@24.557,92.207
NetC19_1: C19.1 C20.1 DD2.4 | length 6
  Top w0.5: C20.1@125.816,86.4 127.716,86.4 C19.1@128,86.684 128.006,86.69 DD2.4@131.712,86.69
NetC20_2: C20.2 R110.1 | length 2.5
  Top w0.5: R110.1@123.557,88.9 123.584,88.873 C20.2@123.584,86.4
NetC21_1: 
NetC22_1: 
NetC23_1: 
NetCIO_1_1: 
NetD1_1: D1.1 R102.2 R104.1 | length 7.5
  Top w0.5: R104.1@23.443,66.7 24.8,66.7 ; D1.1@24.6,61.35 24.8,61.55 24.8,66.7 ; R102.2@25.496,66.641 25.349,66.7 24.8,66.7
NetD1_5: D1.5 Q1.1 | length 3.8
  Top w0.5: D1.5@27,61.35 D1.5@27.2,61.35 30.49,61.35 Q1.1@30.7,61.56
NetD2_1: D2.1 R106.2 R108.1 | length 11.9
  Top w0.5: R108.1@23.443,104 24.5,104 ; D2.1@24.6,94.45 24.6,103.9 24.5,104 ; R106.2@25.757,104 24.5,104
NetD2_5: D2.5 Q2.1 | length 3.9
  Top w0.5: D2.5@27,94.45 30.67,94.45 Q2.1@30.8,94.58
NetDD1_1: 
NetDD2_1: DD2.1 L3.0 VD4.1 | length 11.7
  Top w0.5: DD2.1@131.712,90.5 131.712,94.498 VD4.1@131.814,94.6 131.814,102.071 L3.0@131.785,102.1
NetDD2_5: DD2.5 R109.2 R111.1 | length 7.4
  Top w0.5: DD2.5@137.3,86.69 143.033,86.69 143.1,86.757 144.657,86.757 R109.2@144.7,86.8
NetDD3_2: 
NetL1_1: L1.1 Q1.4 VD2.2 | length 23.4
  Top w0.75: VD2.2@36.06,75.2 33.5,75.2 31.685,73.385 L1.1@31.685,68.3 35.1,68.3 36.95,66.45 Q1.4@36.95,59.28
NetL2_2: L2.2 Q2.4 VD3.2 | length 21.2
  Top w0.9: Q2.4@37.05,92.3 37.44,92.69 37.44,98.6 ; VD3.2@37.44,104.1 37.44,98.6 ; L2.2@46.6,98.8 37.64,98.8 37.44,98.6
NetR1_2: R1.2 U3.15 | length 23.6
  Top w0.3: U3.15@109.26,44.6 109.26,46.36 v1(109.3,46.4) ; v1(109.3,35.9) 111.3,33.9 114.1,33.9 116.6,31.4 R1.2@116.6,29.243
  Bottom w0.3: v1(109.3,35.9) v1(109.3,46.4)
NetR2_2: R2.2 U2.15 | length 74.3
  Top w0.4: v1(75.8,113.3) 75.8,111.4 74.2,109.8 74.2,100.6 76.2,98.6 U2.15@76.2,60.8 ; v1(81.7,115.4) 86.1,115.4 87.8,117.1 87.8,123.157 R2.2@88,123.357
  Bottom w0.3: v1(75.8,113.3) 75.8,113.9 77.3,115.4 v1(81.7,115.4)
NetR3_2: R3.2 U2.1 | length 76.1
  Top w0.4: v1(74.9,114.2) 74.9,114.1 73.5,112.7 73.5,100 73.8,99.7 75.3,98.2 75.3,73.7 73.3,71.7 73.3,57.2 74.92,55.58 U2.1@74.92,55.1 ; R3.2@82.4,123.357 82.9,122.857 v1(82.9,119.6)
  Bottom w0.3: v1@74.951,114.2 80.351,119.6 v1(82.9,119.6)
  Bottom w0.4: v1(74.9,114.2) v1@74.951,114.2
NetR4_2: R4.2 U2.2 | length 40.7
  Top w0.3: U2.2@76.19,55.1 76.19,52.91 v1(76.2,52.9) ; v1(81.8,35.3) 81.8,35.2 82.7,34.3 82.7,29 83.5,28.2 87.5,28.2 87.9,27.8 R4.2@87.9,23.343 ; R4.2@87.9,23.243 R4.2@87.9,23.343 ; R4.2@88,23.243 R4.2@87.9,23.343
  Bottom w0.3: v1(76.2,52.9) 77.5,52.9 78.6,51.8 78.6,37.3 80.6,35.3 v1(81.8,35.3)
NetR5_2: R5.2 U2.3 | length 34.1
  Top w0.3: U2.3@77.46,55.1 77.6,54.96 v1(77.6,51.5) ; v1(81.4,34.3) 81.4,31.2 82.2,30.4 R5.2@82.2,23.243
  Bottom w0.3: v1(77.6,51.5) 77.6,37.593 80.893,34.3 v1(81.4,34.3)
NetR6_2: R6.2 U2.4 | length 34.7
  Top w0.3: v1(78.7,52.9) 78.7,55.07 U2.4@78.73,55.1 ; v1(83.4,34.6) 83.4,34.5 84.1,33.8 89.7,33.8 89.7,29.843 R6.2@89.1,29.243
  Bottom w0.3: v1(78.7,52.9) 80,52.9 82.6,50.3 82.6,39 83.4,38.2 v1(83.4,34.6)
NetR7_2: R7.2 U2.5 | length 26.6
  Top w0.3: v1(79.5,51.5) 80,52 U2.5@80,55.1 ; v1(80.6,36.4) 80.6,29.543 R7.2@80.9,29.243
  Bottom w0.3: v1(79.5,51.5) 79.5,37.5 v1(80.6,36.4)
NetR8_2: R8.2 U2.6 | length 39.1
  Top w0.3: U2.6@81.27,55.1 81.3,55.07 v1(81.3,52.8) ; v1(84.5,34.6) 90.3,34.6 90.4,34.5 90.4,23.343 R8.2@90.5,23.243
  Bottom w0.3: v1(81.3,52.8) 83.2,50.9 83.2,39.4 84.3,38.3 84.3,34.8 v1(84.5,34.6)
NetR9_2: R9.2 U2.7 | length 33
  Top w0.3: R9.2@79.7,23.243 79.7,36.7 v1(80.6,37.6) ; v1(80.6,51.1) 80.6,51.11 82.54,53.05 U2.7@82.54,55.1
  Bottom w0.3: v1(80.6,37.6) v1(80.6,51.1)